# Altium PCB Sensors_PCB.PcbDoc
Units mm, origin at the board's own origin, x right, y up, seen from the top; angles counter-clockwise.
Board outline 83.19 x 60.96 mm, 2 copper layers (Top Layer, Bottom Layer); 5 components, 7 nets, 26 pads, 2 vias.
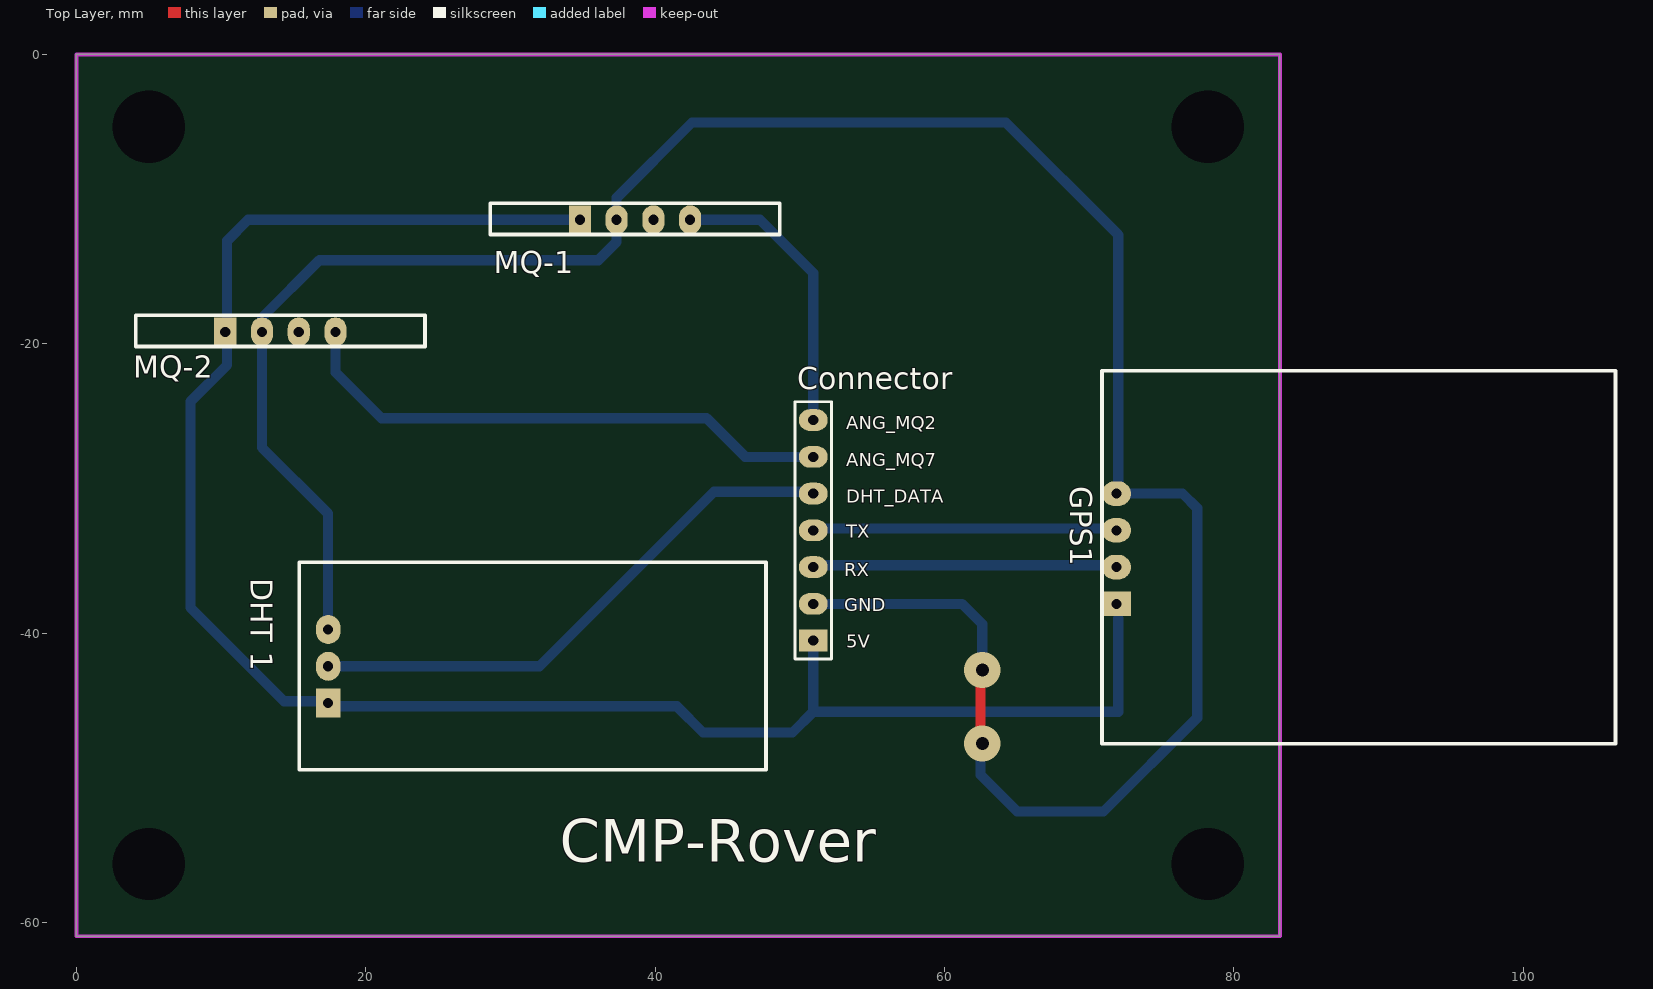
[diagram p0: Top Layer view]
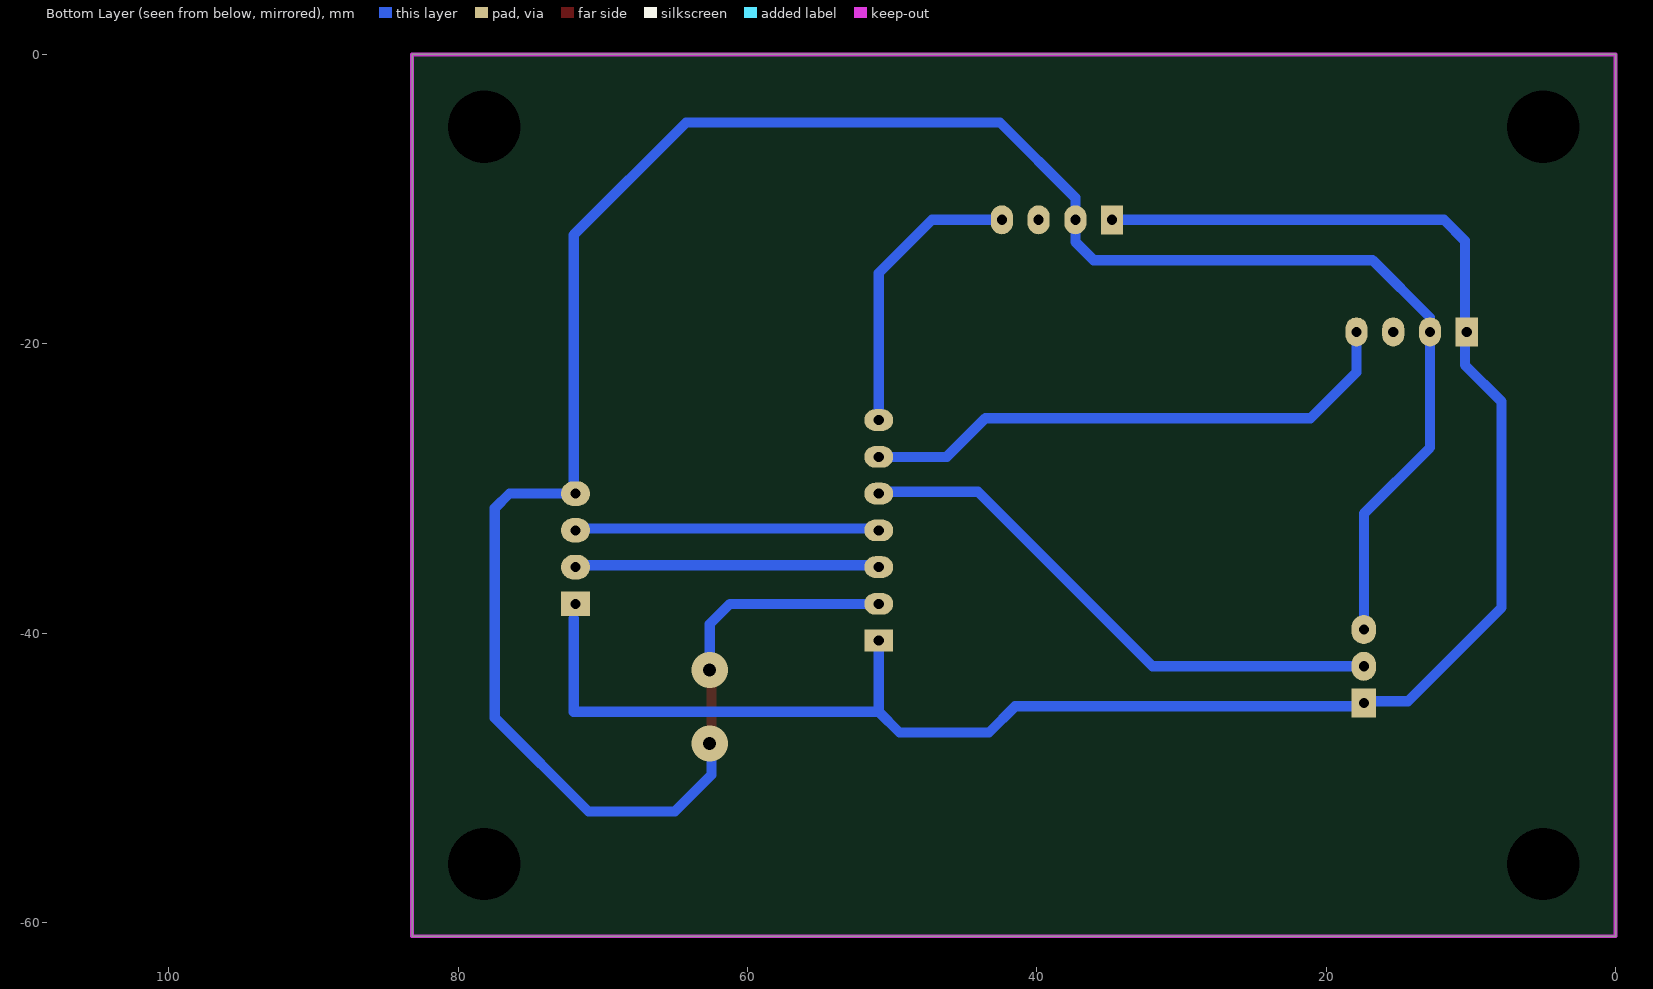
[diagram p1: Bottom Layer view, seen from below]

## Layer stack, top to bottom
Top Solder: solder mask 0.0102, Solder Resist, Dk 3.5
Top Layer: signal copper 0.0356
Dielectric 1: dielectric 0.32, FR-4, Dk 4.8
Bottom Layer: signal copper 0.0356
Bottom Solder: solder mask 0.0102, Solder Resist, Dk 3.5

## Board outline
0,-60.96 0,0 83.185,0 83.185,-60.96

## Design rules (kind name [scope] priority, off if disabled: settings)
Clearance [All] p1: gap=0.254 ignorepadtopadclearanceinfootprint=FALSE except(0: Arc-Hole Track-Hole SMDPad-Hole THPad-Hole Via-Hole Fill-Hole Poly-Hole Region-Hole Text-Hole; 0.5: Arc-Arc Arc-Track Arc-SMDPad Arc-THPad Track-Track Track-SMDPad Track-THPad)
Height [All] p1: minheight=0 maxheight=100 prefheight=12.7
PolygonConnect [All] p1: connectstyle=Relief reliefconductorwidth=0.254 reliefentries=4 polygonreliefangle="90 Angle" airgapwidth=0.254
RoutingVias [All] p1: holewidth=0.711 width=1.27 viastyle="Through Hole" minholewidth=0.711 minwidth=1.27 maxholewidth=0.711 maxwidth=1.27
SolderMaskExpansion [All] p1: expansion=0.102
Width [All] p1: maxlimit=1 minlimit=0.5 preferedwidth=0.7 minimp=50.000000 maximp=50.000000 favimp=50.000000
29 further rules are at their usual default settings.

## Components (designator, comment, footprint, x,y, rotation, side; value= is the part's Value field where it differs from the comment)
Connector "Header 7" HDR1X7 50.927,-40.513 r90 top (schematic designator P?)
"DHT 1" "DHT" DHT 15.399,-49.441 r180 top
GPS1 "GPS" GPS 70.882,-21.853 r90 top
MQ-1 "MQ-7" "MQ-7 Up" 38.608,-11.43 r0 top
MQ-2 "MQ-7" "MQ-7 Up" 14.097,-19.177 r0 top

## Footprints (in the part's own frame and the unit in brackets; to place one, negate y for a bottom-side part, rotate by r counter-clockwise, add the part's x,y. Pads: shape width x height; smd on the part's side, far side on the other; paste and mask are expansions set on the pad)
DHT [mm]
  rect 1.7x2 hole 0.7: 9(-2,-4.61)
  oval 1.7x2 hole 0.7: 10(-2,-7.15) 11(-2,-9.69)
  silkscreen extent -32.26,-14.35 0,0, body extent -22.1,-14.73 5.59,1.27, height 6.46
GPS [mm]
  rect 1.7x2 hole 0.7: 12(-16.12,-1)
  oval 1.7x2 hole 0.7: 13(-13.58,-1) 14(-11.04,-1) 15(-8.5,-1)
  silkscreen extent -25.8,-35.5 0,0, body extent -25.02,-47.98 13.71,-0.13, height 25.61
HDR1X7 [mm] "Connector; Header; 7 Position"
  rect 1.5x2 hole 0.7: 1(0,0)
  oval 1.5x2 hole 0.7: 2(2.54,0) 3(5.08,0) 4(7.62,0) 5(10.16,0) 6(12.7,0) 7(15.24,0)
  silkscreen extent -1.27,-1.27 16.51,1.27
"MQ-7 Up" [mm]
  rect 1.524x2 hole 0.7: 43(-3.81,0)
  oval 1.524x2 hole 0.7: 44(-1.27,0) 45(1.27,0) 46(3.81,0)
  silkscreen extent -10,-1.02 10,1.14, body extent -11.18,-0.88 11.12,15.62, height 32.75

## Part data
Connector: "Header, 7-Pin", LatestRevisionDate=17-Jul-2002, LatestRevisionNote="Re-released for DXP Platform.", Publisher="Altium Limited"

## Free pads (board coordinates)
  round 1.524 hole 5: 3(5,-55.96) 3(5,-5) 3(78.185,-55.96) 3(78.185,-5)

## Via types
v1: diameter 2.5, hole 0.9, Top Layer to Bottom Layer, 2 vias

## Nets (pads, with @x,y where several pads share a name; then routed paths per layer and width w, separated by ;. In a path a pad name is that pad's centre, name@x,y a point inside that pad or via, vN(x,y) a via of type N, cw(c..) or ccw(c..) an arc to the next point about the centre after c; other vN are vias at no path point)
5: "DHT 1.9" Connector.1 GPS1.12 MQ-1.43 MQ-2.43 | length 131
  Bottom Layer w0.7: MQ-2.43 10.414,-19.177 10.414,-12.878 11.862,-11.43 MQ-1.43 ; MQ-2.43@10.414,-19.558 10.414,-21.463 7.874,-24.003 7.874,-38.227 14.351,-44.704 17.399,-44.704 17.653,-44.45 ; 17.399,-45.053 41.497,-45.053 43.307,-46.863 49.498,-46.863 50.927,-45.434 ; Connector.1 50.927,-45.434 ; 72.009,-38.989 72.009,-45.434 50.927,-45.434
ANG_MQ2: Connector.7 MQ-1.46 | length 20.2
  Bottom Layer w0.7: MQ-1.46 47.244,-11.43 50.927,-15.113 Connector.7
ANG_MQ7: Connector.6 MQ-2.46 | length 38.2
  Bottom Layer w0.7: MQ-2.46 17.907,-21.971 21.082,-25.146 43.561,-25.146 46.228,-27.813 Connector.6
DHT_DATA: "DHT 1.10" Connector.5 | length 38.5
  Bottom Layer w0.7: 17.399,-42.291 32.004,-42.291 44.069,-30.226 Connector.5@50.927,-30.226
GND: "DHT 1.11" Connector.2 GPS1.15 MQ-1.44 MQ-2.44 | length 173.1
  Top Layer w0.7: v1@62.484,-48.133 62.484,-42.672 v1(62.611,-42.545)
  Bottom Layer w0.7: 17.399,-39.751 17.399,-31.75 12.827,-27.178 MQ-2.44 12.827,-18.186 16.789,-14.224 36.068,-14.224 37.338,-12.954 MQ-1.44 37.338,-9.906 42.545,-4.699 64.237,-4.699 72.009,-12.471 GPS1.15@72.009,-30.353 ; Connector.2 61.214,-37.973 62.611,-39.37 v1(62.611,-42.545) ; v1@62.484,-48.133 62.484,-49.784 65.024,-52.324 70.993,-52.324 77.47,-45.847 77.47,-33.401 77.47,-31.369 76.454,-30.353 GPS1.15@72.009,-30.353 ; GPS1.15 GPS1.15@72.009,-30.353
  other v1: 62.611,-47.625
RX: Connector.3 GPS1.13 | length 21
  Bottom Layer w0.7: Connector.3@50.927,-35.306 GPS1.13@71.882,-35.306
TX: Connector.4 GPS1.14 | length 20.8
  Bottom Layer w0.7: Connector.4@51.054,-32.766 GPS1.14@71.882,-32.766
pads on no net: MQ-1.45 MQ-2.45

## Keep-outs
Keep-Out Layer:
  the board outline again, w0.254

## Silkscreen, mask and mechanical layers (free items; w line width, h text height)
Top Overlay:
  text "ANG_MQ2" at 53.213,-25.908 h0.9
  text "ANG_MQ7" at 53.213,-28.448 h0.9
  text "DHT_DATA" at 53.213,-30.988 h0.9
  text "TX" at 53.213,-33.401 h0.9
  text "RX" at 53.086,-36.068 h0.9
  text "GND" at 53.086,-38.481 h0.9
  text "5V" at 53.213,-41.021 h0.9
  text "CMP-Rover" at 33.401,-56.769 h5